# Altium PCB 十六路输出.PcbDoc (part 2 of 3)
Units mm, origin at the board's own origin, x right, y up, seen from the top; angles counter-clockwise.
Board outline 122.4 x 87.4 mm, 2 copper layers (Top Layer, Bottom Layer); 99 components, 112 nets, 383 pads, 41 vias.
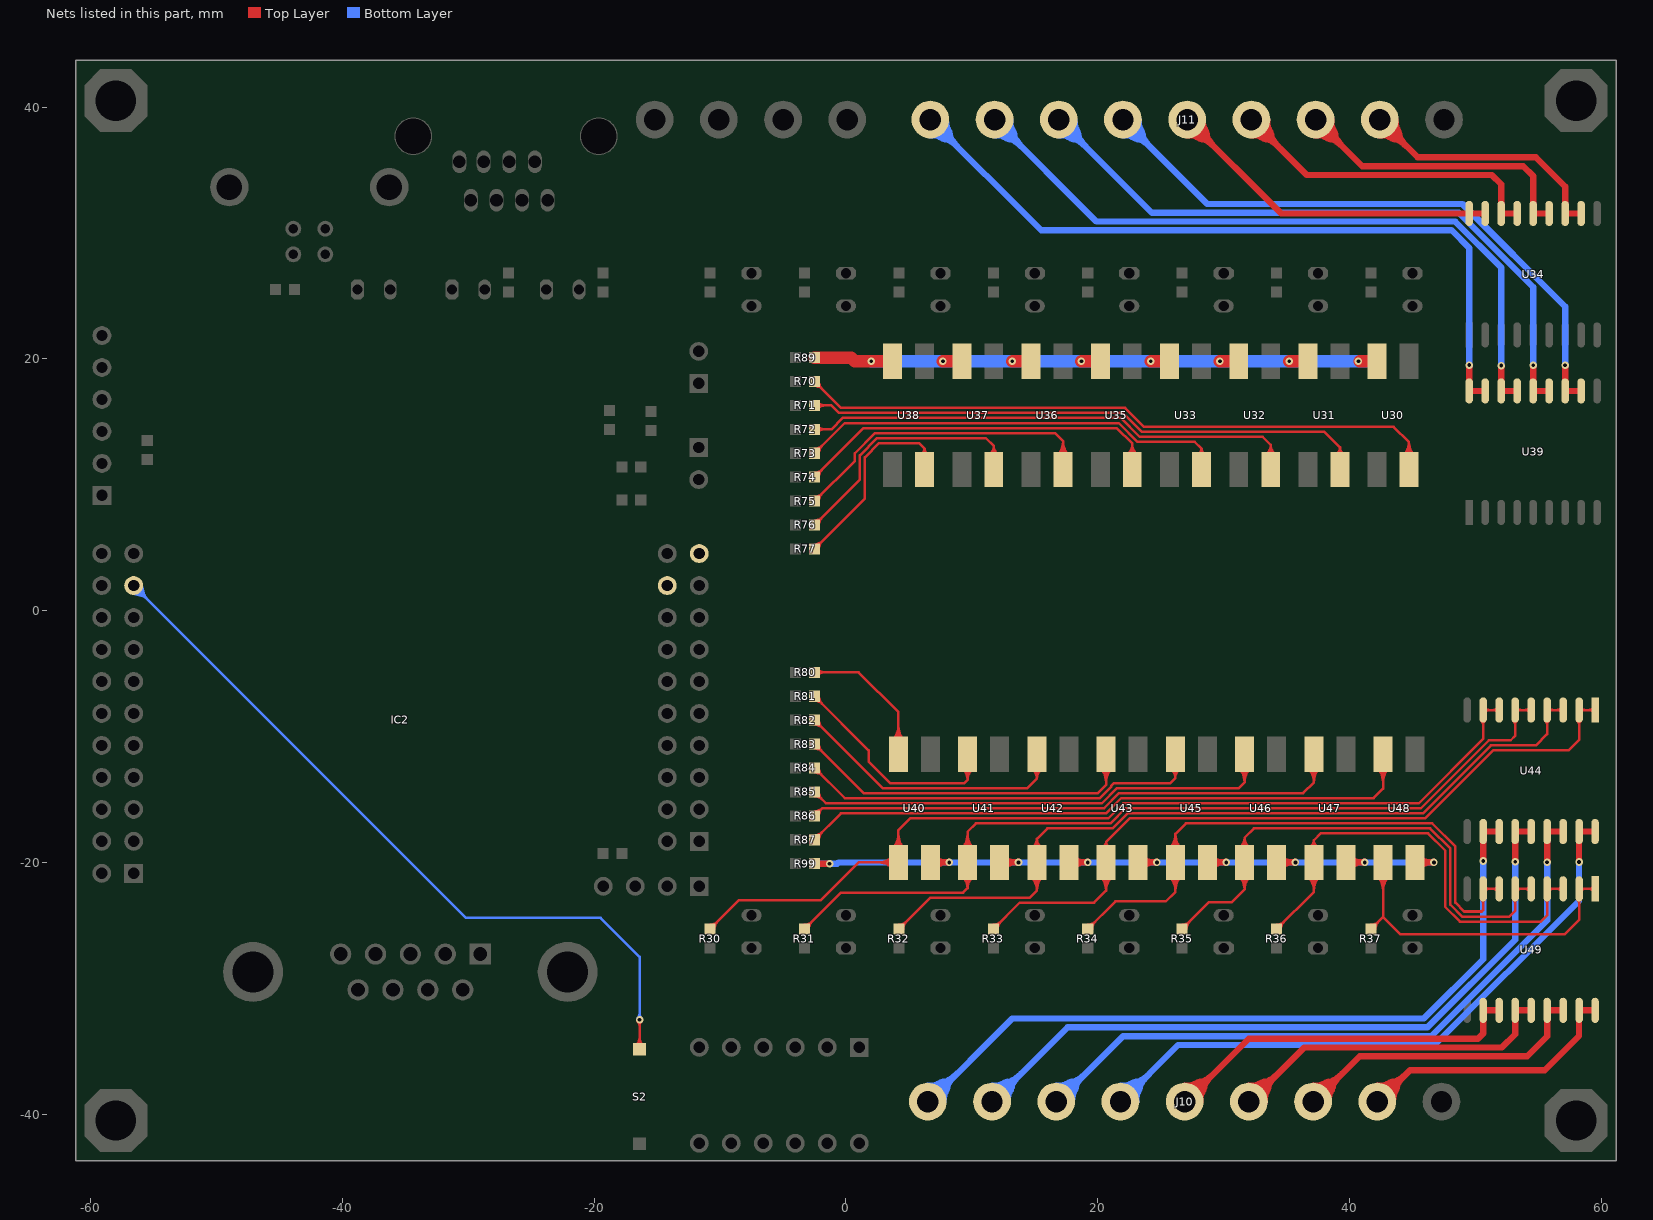
[diagram p2: the nets of this part, all layers, seen from the top]

## Via types
v1: diameter 0.6, hole 0.3, Top Layer to Bottom Layer, 41 vias

## Nets (pads, with @x,y where several pads share a name; then routed paths per layer and width w, separated by ;. In a path a pad name is that pad's centre, name@x,y a point inside that pad or via, vN(x,y) a via of type N, cw(c..) or ccw(c..) an arc to the next point about the centre after c; other vN are vias at no path point) (continued)
NetR30_1: R30.1 U40.3 U44.7 U44.8 | length 98
  Top Layer w0.2: R30.1@-10.9,-25.5 R30.1@-10.75,-25.35 ; R30.1@-10.859,-25.288 cw(c-10.324,-25.397) R30.1@-10.465,-24.87 ; R30.1@-10.8,-25.3 -8.5,-23 -2,-23 1,-20 U40.3@4.16,-20 4.16,-17.44 5.1,-16.5 20.828,-16.5 22.028,-15.3 45.5,-15.3 50.61,-10.19 U44.8@50.61,-7.9 U44.7@51.88,-7.9 ; R30.1@-10.788,-25.359 ccw(c-10.897,-24.824) R30.1@-10.37,-24.965 ; -10.22,-24.72 cw(c-10.8,-24.139) -10.8,-24.96 ccw(c-10.8,-24.139) -10.22,-24.72 ; -10.22,-24.72 ccw(c-9.639,-25.3) -10.46,-25.3 cw(c-9.639,-25.3) -10.22,-24.72 ; 2.591,-20 cw(c2.591,-21.569) 3.7,-20.46 ccw(c2.591,-21.569) 2.591,-20 ; 2.591,-20 ccw(c2.591,-18.431) 3.7,-19.54 cw(c2.591,-18.431) 2.591,-20 ; 3.074,-20 cw(c3.074,-21.086) 3.842,-20.318 ccw(c3.074,-21.086) 3.074,-20 ; 3.074,-20 ccw(c3.074,-18.914) 3.842,-19.682 cw(c3.074,-18.914) 3.074,-20 ; 4.16,-18.264 cw(c3.074,-18.264) 3.842,-19.032 ccw(c3.074,-18.264) 4.16,-18.264 ; 4.16,-18.264 ccw(c5.246,-18.264) 4.478,-19.032 cw(c5.246,-18.264) 4.16,-18.264 ; 4.16,-17.781 cw(c2.591,-17.781) 3.7,-18.89 ccw(c2.591,-17.781) 4.16,-17.781 ; 4.16,-17.781 ccw(c5.729,-17.781) 4.62,-18.89 cw(c5.729,-17.781) 4.16,-17.781 ; 50.61,-9.083 cw(c51.093,-9.083) 50.751,-8.741 ccw(c51.093,-9.083) 50.61,-9.083 ; 50.61,-9.083 ccw(c50.127,-9.083) 50.469,-8.741 cw(c50.127,-9.083) 50.61,-9.083 ; 51.093,-7.9 cw(c51.093,-7.417) 50.751,-7.759 ccw(c51.093,-7.417) 51.093,-7.9 ; 51.093,-7.9 ccw(c51.093,-8.383) 50.751,-8.041 cw(c51.093,-8.383) 51.093,-7.9 ; 51.397,-7.9 cw(c51.397,-8.383) 51.739,-8.041 ccw(c51.397,-8.383) 51.397,-7.9 ; 51.397,-7.9 ccw(c51.397,-7.417) 51.739,-7.759 cw(c51.397,-7.417) 51.397,-7.9
NetR31_1: R31.1 U41.3 U44.5 U44.6 | length 92.5
  Top Layer w0.2: R31.1@-3.4,-25.5 R31.1@-3.25,-25.35 ; R31.1@-3.359,-25.288 cw(c-2.824,-25.397) R31.1@-2.965,-24.87 ; R31.1@-3.3,-25.3 -0.4,-22.4 9.3,-22.4 9.66,-22.04 ; R31.1@-3.288,-25.359 ccw(c-3.397,-24.824) R31.1@-2.87,-24.965 ; U44.5@54.42,-7.9 U44.6@53.15,-7.9 53.15,-9.95 52.8,-10.3 51.066,-10.3 45.666,-15.7 22.194,-15.7 20.994,-16.9 10.325,-16.9 9.66,-17.565 U41.3@9.66,-20 9.66,-22.04 ; -2.72,-24.72 cw(c-3.3,-24.139) -3.3,-24.96 ccw(c-3.3,-24.139) -2.72,-24.72 ; -2.72,-24.72 ccw(c-2.139,-25.3) -2.96,-25.3 cw(c-2.139,-25.3) -2.72,-24.72 ; 9.66,-22.04 cw(c10.821,-22.04) 10.077,-21.149 ccw(c10.821,-22.04) 9.66,-22.04 ; 9.66,-22.04 ccw(c8.499,-22.04) 9.243,-21.149 cw(c8.499,-22.04) 9.66,-22.04 ; 9.66,-21.612 cw(c10.464,-21.612) 9.948,-20.995 ccw(c10.464,-21.612) 9.66,-21.612 ; 9.66,-21.612 ccw(c8.856,-21.612) 9.372,-20.995 cw(c8.856,-21.612) 9.66,-21.612 ; 9.66,-18.264 cw(c8.574,-18.264) 9.342,-19.032 ccw(c8.574,-18.264) 9.66,-18.264 ; 9.66,-18.264 ccw(c10.746,-18.264) 9.978,-19.032 cw(c10.746,-18.264) 9.66,-18.264 ; 9.66,-17.781 cw(c8.091,-17.781) 9.2,-18.89 ccw(c8.091,-17.781) 9.66,-17.781 ; 9.66,-17.781 ccw(c11.229,-17.781) 10.12,-18.89 cw(c11.229,-17.781) 9.66,-17.781 ; 53.15,-9.083 cw(c53.633,-9.083) 53.291,-8.741 ccw(c53.633,-9.083) 53.15,-9.083 ; 53.15,-9.083 ccw(c52.667,-9.083) 53.009,-8.741 cw(c52.667,-9.083) 53.15,-9.083 ; 53.633,-7.9 cw(c53.633,-7.417) 53.291,-7.759 ccw(c53.633,-7.417) 53.633,-7.9 ; 53.633,-7.9 ccw(c53.633,-8.383) 53.291,-8.041 cw(c53.633,-8.383) 53.633,-7.9 ; 53.937,-7.9 cw(c53.937,-8.383) 54.279,-8.041 ccw(c53.937,-8.383) 53.937,-7.9 ; 53.937,-7.9 ccw(c53.937,-7.417) 54.279,-7.759 cw(c53.937,-7.417) 53.937,-7.9
NetR32_1: R32.1 U42.3 U44.3 U44.4 | length 85.7
  Top Layer w0.2: R32.1@4.1,-25.5 R32.1@4.25,-25.35 ; R32.1@4.141,-25.288 cw(c4.676,-25.397) R32.1@4.535,-24.87 ; R32.1@4.2,-25.3 6.7,-22.8 14.6,-22.8 15.16,-22.24 U42.3@15.16,-20 15.16,-18.14 ; R32.1@4.212,-25.359 ccw(c4.103,-24.824) R32.1@4.63,-24.965 ; U44.3@56.96,-7.9 U44.4@55.69,-7.9 55.69,-9.81 54.8,-10.7 51.231,-10.7 45.831,-16.1 22.36,-16.1 21.16,-17.3 16,-17.3 15.16,-18.14 ; 4.78,-24.72 cw(c4.2,-24.139) 4.2,-24.96 ccw(c4.2,-24.139) 4.78,-24.72 ; 4.78,-24.72 ccw(c5.361,-25.3) 4.54,-25.3 cw(c5.361,-25.3) 4.78,-24.72 ; 15.16,-22.219 cw(c16.729,-22.219) 15.62,-21.11 ccw(c16.729,-22.219) 15.16,-22.219 ; 15.16,-22.219 ccw(c13.591,-22.219) 14.7,-21.11 cw(c13.591,-22.219) 15.16,-22.219 ; 15.16,-21.736 cw(c16.246,-21.736) 15.478,-20.968 ccw(c16.246,-21.736) 15.16,-21.736 ; 15.16,-21.736 ccw(c14.074,-21.736) 14.842,-20.968 cw(c14.074,-21.736) 15.16,-21.736 ; 15.16,-18.512 cw(c14.605,-18.512) 14.912,-18.975 ccw(c14.605,-18.512) 15.16,-18.512 ; 15.16,-18.512 ccw(c15.715,-18.512) 15.408,-18.975 cw(c15.715,-18.512) 15.16,-18.512 ; 15.16,-18.14 cw(c14.359,-18.14) 14.801,-18.808 ccw(c14.359,-18.14) 15.16,-18.14 ; 15.16,-18.14 ccw(c15.961,-18.14) 15.519,-18.808 cw(c15.961,-18.14) 15.16,-18.14 ; 55.69,-9.083 cw(c56.173,-9.083) 55.831,-8.741 ccw(c56.173,-9.083) 55.69,-9.083 ; 55.69,-9.083 ccw(c55.207,-9.083) 55.549,-8.741 cw(c55.207,-9.083) 55.69,-9.083 ; 56.173,-7.9 cw(c56.173,-7.417) 55.831,-7.759 ccw(c56.173,-7.417) 56.173,-7.9 ; 56.173,-7.9 ccw(c56.173,-8.383) 55.831,-8.041 cw(c56.173,-8.383) 56.173,-7.9 ; 56.477,-7.9 cw(c56.477,-8.383) 56.819,-8.041 ccw(c56.477,-8.383) 56.477,-7.9 ; 56.477,-7.9 ccw(c56.477,-7.417) 56.819,-7.759 cw(c56.477,-7.417) 56.477,-7.9
NetR33_1: R33.1 U43.3 U44.1 U44.2 | length 77.5
  Top Layer w0.2: R33.1@11.6,-25.5 R33.1@11.75,-25.35 ; R33.1@11.641,-25.288 cw(c12.176,-25.397) R33.1@12.035,-24.87 ; R33.1@11.7,-25.3 13.8,-23.2 19.7,-23.2 20.66,-22.24 U43.3@20.66,-20 20.66,-18.365 ; R33.1@11.712,-25.359 ccw(c11.603,-24.824) R33.1@12.13,-24.965 ; U44.1@59.5,-7.9 U44.2@58.23,-7.9 58.23,-10.27 57.4,-11.1 51.397,-11.1 45.997,-16.5 22.525,-16.5 20.66,-18.365 ; 12.28,-24.72 cw(c11.7,-24.139) 11.7,-24.96 ccw(c11.7,-24.139) 12.28,-24.72 ; 12.28,-24.72 ccw(c12.861,-25.3) 12.04,-25.3 cw(c12.861,-25.3) 12.28,-24.72 ; 20.66,-22.219 cw(c22.229,-22.219) 21.12,-21.11 ccw(c22.229,-22.219) 20.66,-22.219 ; 20.66,-22.219 ccw(c19.091,-22.219) 20.2,-21.11 cw(c19.091,-22.219) 20.66,-22.219 ; 20.66,-21.736 cw(c21.746,-21.736) 20.978,-20.968 ccw(c21.746,-21.736) 20.66,-21.736 ; 20.66,-21.736 ccw(c19.574,-21.736) 20.342,-20.968 cw(c19.574,-21.736) 20.66,-21.736 ; 20.66,-18.365 cw(c20.239,-18.365) 20.405,-18.752 ccw(c20.239,-18.365) 20.66,-18.365 ; 20.66,-18.365 ccw(c21.081,-18.365) 20.915,-18.752 cw(c21.081,-18.365) 20.66,-18.365 ; 58.23,-9.083 cw(c58.713,-9.083) 58.371,-8.741 ccw(c58.713,-9.083) 58.23,-9.083 ; 58.23,-9.083 ccw(c57.747,-9.083) 58.089,-8.741 cw(c57.747,-9.083) 58.23,-9.083 ; 58.713,-7.9 cw(c58.713,-7.417) 58.371,-7.759 ccw(c58.713,-7.417) 58.713,-7.9 ; 58.713,-7.9 ccw(c58.713,-8.383) 58.371,-8.041 cw(c58.713,-8.383) 58.713,-7.9 ; 59.017,-7.9 cw(c59.017,-8.383) 59.359,-8.041 ccw(c59.017,-8.383) 59.017,-7.9 ; 59.017,-7.9 ccw(c59.017,-7.417) 59.359,-7.759 cw(c59.017,-7.417) 59.017,-7.9
NetR34_1: R34.1 U45.3 U49.7 U49.8 | length 71.3
  Top Layer w0.2: R34.1@19.1,-25.5 R34.1@19.25,-25.35 ; R34.1@19.141,-25.288 cw(c19.676,-25.397) R34.1@19.535,-24.87 ; R34.1@19.2,-25.3 21.4,-23.1 25.4,-23.1 26.16,-22.34 U45.3@26.16,-20 26.16,-17.74 27,-16.9 46.566,-16.9 48.4,-18.734 48.4,-23.2 49.1,-23.9 50.5,-23.9 50.61,-23.79 U49.8@50.61,-22.1 U49.7@51.88,-22.1 ; R34.1@19.212,-25.359 ccw(c19.103,-24.824) R34.1@19.63,-24.965 ; 19.78,-24.72 cw(c19.2,-24.139) 19.2,-24.96 ccw(c19.2,-24.139) 19.78,-24.72 ; 19.78,-24.72 ccw(c20.361,-25.3) 19.54,-25.3 cw(c20.361,-25.3) 19.78,-24.72 ; 26.16,-22.219 cw(c27.729,-22.219) 26.62,-21.11 ccw(c27.729,-22.219) 26.16,-22.219 ; 26.16,-22.219 ccw(c24.591,-22.219) 25.7,-21.11 cw(c24.591,-22.219) 26.16,-22.219 ; 26.16,-21.736 cw(c27.246,-21.736) 26.478,-20.968 ccw(c27.246,-21.736) 26.16,-21.736 ; 26.16,-21.736 ccw(c25.074,-21.736) 25.842,-20.968 cw(c25.074,-21.736) 26.16,-21.736 ; 26.16,-18.264 cw(c25.074,-18.264) 25.842,-19.032 ccw(c25.074,-18.264) 26.16,-18.264 ; 26.16,-18.264 ccw(c27.246,-18.264) 26.478,-19.032 cw(c27.246,-18.264) 26.16,-18.264 ; 26.16,-17.781 cw(c24.591,-17.781) 25.7,-18.89 ccw(c24.591,-17.781) 26.16,-17.781 ; 26.16,-17.781 ccw(c27.729,-17.781) 26.62,-18.89 cw(c27.729,-17.781) 26.16,-17.781 ; 50.61,-23.283 cw(c51.093,-23.283) 50.751,-22.941 ccw(c51.093,-23.283) 50.61,-23.283 ; 50.61,-23.283 ccw(c50.127,-23.283) 50.469,-22.941 cw(c50.127,-23.283) 50.61,-23.283 ; 51.093,-22.1 cw(c51.093,-21.617) 50.751,-21.959 ccw(c51.093,-21.617) 51.093,-22.1 ; 51.093,-22.1 ccw(c51.093,-22.583) 50.751,-22.241 cw(c51.093,-22.583) 51.093,-22.1 ; 51.397,-22.1 cw(c51.397,-22.583) 51.739,-22.241 ccw(c51.397,-22.583) 51.397,-22.1 ; 51.397,-22.1 ccw(c51.397,-21.617) 51.739,-21.959 cw(c51.397,-21.617) 51.397,-22.1
NetR35_1: R35.1 U46.3 U49.5 U49.6 | length 63.3
  Top Layer w0.2: R35.1@26.6,-25.5 R35.1@26.75,-25.35 ; R35.1@26.641,-25.288 cw(c27.176,-25.397) R35.1@27.035,-24.87 ; R35.1@26.7,-25.3 28.85,-23.15 30.65,-23.15 31.66,-22.14 ; R35.1@26.712,-25.359 ccw(c26.603,-24.824) R35.1@27.13,-24.965 ; U49.5@54.42,-22.1 U49.6@53.15,-22.1 53.15,-23.85 52.7,-24.3 48.934,-24.3 48,-23.366 48,-18.9 46.4,-17.3 32.4,-17.3 31.66,-18.04 ; 27.28,-24.72 cw(c26.7,-24.139) 26.7,-24.96 ccw(c26.7,-24.139) 27.28,-24.72 ; 27.28,-24.72 ccw(c27.861,-25.3) 27.04,-25.3 cw(c27.861,-25.3) 27.28,-24.72 ; 31.66,-22.14 cw(c33.043,-22.14) 32.102,-21.126 ccw(c33.043,-22.14) 31.66,-22.14 ; 31.66,-22.14 ccw(c30.277,-22.14) 31.218,-21.126 cw(c30.277,-22.14) 31.66,-22.14 ; 31.66,-22.14 U46.3@31.66,-20 31.66,-18.04 ; 31.66,-21.681 cw(c32.617,-21.681) 31.966,-20.98 ccw(c32.617,-21.681) 31.66,-21.681 ; 31.66,-21.681 ccw(c30.703,-21.681) 31.354,-20.98 cw(c30.703,-21.681) 31.66,-21.681 ; 31.66,-18.443 cw(c30.971,-18.443) 31.388,-18.992 ccw(c30.971,-18.443) 31.66,-18.443 ; 31.66,-18.443 ccw(c32.349,-18.443) 31.932,-18.992 cw(c32.349,-18.443) 31.66,-18.443 ; 31.66,-18.04 cw(c30.665,-18.04) 31.267,-18.832 ccw(c30.665,-18.04) 31.66,-18.04 ; 31.66,-18.04 ccw(c32.655,-18.04) 32.053,-18.832 cw(c32.655,-18.04) 31.66,-18.04 ; 53.15,-23.283 cw(c53.633,-23.283) 53.291,-22.941 ccw(c53.633,-23.283) 53.15,-23.283 ; 53.15,-23.283 ccw(c52.667,-23.283) 53.009,-22.941 cw(c52.667,-23.283) 53.15,-23.283 ; 53.633,-22.1 cw(c53.633,-21.617) 53.291,-21.959 ccw(c53.633,-21.617) 53.633,-22.1 ; 53.633,-22.1 ccw(c53.633,-22.583) 53.291,-22.241 cw(c53.633,-22.583) 53.633,-22.1 ; 53.937,-22.1 cw(c53.937,-22.583) 54.279,-22.241 ccw(c53.937,-22.583) 53.937,-22.1 ; 53.937,-22.1 ccw(c53.937,-21.617) 54.279,-21.959 cw(c53.937,-21.617) 53.937,-22.1
NetR36_1: R36.1 U47.3 U49.3 U49.4 | length 57.5
  Top Layer w0.2: R36.1@34.1,-25.5 R36.1@34.25,-25.35 ; R36.1@34.141,-25.288 cw(c34.676,-25.397) R36.1@34.535,-24.87 ; R36.1@34.2,-25.3 37.16,-22.34 U47.3@37.16,-20 37.16,-18.24 ; R36.1@34.212,-25.359 ccw(c34.103,-24.824) R36.1@34.63,-24.965 ; U49.3@56.96,-22.1 U49.4@55.69,-22.1 55.69,-24.21 55.2,-24.7 48.769,-24.7 47.6,-23.531 47.6,-19.066 46.234,-17.7 37.7,-17.7 37.16,-18.24 ; 34.78,-24.72 cw(c34.2,-24.139) 34.2,-24.96 ccw(c34.2,-24.139) 34.78,-24.72 ; 34.78,-24.72 ccw(c35.361,-25.3) 34.54,-25.3 cw(c35.361,-25.3) 34.78,-24.72 ; 37.16,-22.219 cw(c38.729,-22.219) 37.62,-21.11 ccw(c38.729,-22.219) 37.16,-22.219 ; 37.16,-22.219 ccw(c35.591,-22.219) 36.7,-21.11 cw(c35.591,-22.219) 37.16,-22.219 ; 37.16,-21.736 cw(c38.246,-21.736) 37.478,-20.968 ccw(c38.246,-21.736) 37.16,-21.736 ; 37.16,-21.736 ccw(c36.074,-21.736) 36.842,-20.968 cw(c36.074,-21.736) 37.16,-21.736 ; 37.16,-18.582 cw(c36.729,-18.582) 36.94,-18.958 ccw(c36.729,-18.582) 37.16,-18.582 ; 37.16,-18.582 ccw(c37.591,-18.582) 37.38,-18.958 cw(c37.591,-18.582) 37.16,-18.582 ; 37.16,-18.24 cw(c36.537,-18.24) 36.842,-18.783 ccw(c36.537,-18.24) 37.16,-18.24 ; 37.16,-18.24 ccw(c37.783,-18.24) 37.478,-18.783 cw(c37.783,-18.24) 37.16,-18.24 ; 55.69,-23.283 cw(c56.173,-23.283) 55.831,-22.941 ccw(c56.173,-23.283) 55.69,-23.283 ; 55.69,-23.283 ccw(c55.207,-23.283) 55.549,-22.941 cw(c55.207,-23.283) 55.69,-23.283 ; 56.173,-22.1 cw(c56.173,-21.617) 55.831,-21.959 ccw(c56.173,-21.617) 56.173,-22.1 ; 56.173,-22.1 ccw(c56.173,-22.583) 55.831,-22.241 cw(c56.173,-22.583) 56.173,-22.1 ; 56.477,-22.1 cw(c56.477,-22.583) 56.819,-22.241 ccw(c56.477,-22.583) 56.477,-22.1 ; 56.477,-22.1 ccw(c56.477,-21.617) 56.819,-21.959 cw(c56.477,-21.617) 56.477,-22.1
NetR37_1: R37.1 U48.3 U49.1 U49.2 | length 42.7
  Top Layer w0.2: R37.1@41.641,-25.288 cw(c42.176,-25.397) R37.1@42.035,-24.87 ; R37.1@41.7,-25.3 42.66,-24.34 ; R37.1@41.712,-25.359 ccw(c41.603,-24.824) R37.1@42.13,-24.965 ; U48.3@42.66,-20 42.66,-24.34 ; U49.1@59.5,-22.1 U49.2@58.23,-22.1 58.23,-24.57 57.1,-25.7 44.02,-25.7 42.66,-24.34 ; 42.28,-24.72 cw(c41.7,-24.139) 41.7,-24.96 ccw(c41.7,-24.139) 42.28,-24.72 ; 42.28,-24.72 ccw(c42.861,-25.3) 42.04,-25.3 cw(c42.861,-25.3) 42.28,-24.72 ; 42.66,-22.219 cw(c44.229,-22.219) 43.12,-21.11 ccw(c44.229,-22.219) 42.66,-22.219 ; 42.66,-22.219 ccw(c41.091,-22.219) 42.2,-21.11 cw(c41.091,-22.219) 42.66,-22.219 ; 42.66,-21.736 cw(c43.746,-21.736) 42.978,-20.968 ccw(c43.746,-21.736) 42.66,-21.736 ; 42.66,-21.736 ccw(c41.574,-21.736) 42.342,-20.968 cw(c41.574,-21.736) 42.66,-21.736 ; 58.23,-23.283 cw(c58.713,-23.283) 58.371,-22.941 ccw(c58.713,-23.283) 58.23,-23.283 ; 58.23,-23.283 ccw(c57.747,-23.283) 58.089,-22.941 cw(c57.747,-23.283) 58.23,-23.283 ; 58.713,-22.1 cw(c58.713,-21.617) 58.371,-21.959 ccw(c58.713,-21.617) 58.713,-22.1 ; 58.713,-22.1 ccw(c58.713,-22.583) 58.371,-22.241 cw(c58.713,-22.583) 58.713,-22.1 ; 59.017,-22.1 cw(c59.017,-22.583) 59.359,-22.241 ccw(c59.017,-22.583) 59.017,-22.1 ; 59.017,-22.1 ccw(c59.017,-21.617) 59.359,-21.959 cw(c59.017,-21.617) 59.017,-22.1
NetR70_2: R70.2 U30.2 | length 63.2
  Top Layer w0.2: R70.2@-2.559,18.188 ccw(c-2.024,18.297) R70.2@-2.165,17.77 ; R70.2@-2.5,18.2 -0.4,16.1 22.163,16.1 23.663,14.6 43.5,14.6 44.715,13.385 ; R70.2@-2.488,18.259 cw(c-2.597,17.724) R70.2@-2.07,17.865 ; U30.2@44.715,11.2 44.715,13.385 ; -1.92,17.62 cw(c-1.339,18.2) -2.16,18.2 ccw(c-1.339,18.2) -1.92,17.62 ; -1.92,17.62 ccw(c-2.5,17.039) -2.5,17.86 cw(c-2.5,17.039) -1.92,17.62 ; 44.715,12.913 cw(c43.685,12.913) 44.402,12.173 ccw(c43.685,12.913) 44.715,12.913 ; 44.715,12.913 ccw(c45.745,12.913) 45.028,12.173 cw(c45.745,12.913) 44.715,12.913 ; 44.715,13.385 cw(c43.228,13.385) 44.263,12.317 ccw(c43.228,13.385) 44.715,13.385 ; 44.715,13.385 ccw(c46.202,13.385) 45.167,12.317 cw(c46.202,13.385) 44.715,13.385
NetR71_2: R71.2 U31.2 | length 51.9
  Top Layer w0.2: R71.2@-2.5,16.3 -1.166,16.3 -0.566,15.7 21.997,15.7 23.497,14.2 38,14.2 39.24,12.96 ; U31.2@39.24,11.2 39.24,12.96 ; -1.679,16.3 cw(c-1.679,17.121) -2.26,16.54 ccw(c-1.679,17.121) -1.679,16.3 ; -1.679,16.3 ccw(c-1.679,15.479) -2.26,16.06 cw(c-1.679,15.479) -1.679,16.3 ; 39.24,12.618 cw(c38.809,12.618) 39.02,12.242 ccw(c38.809,12.618) 39.24,12.618 ; 39.24,12.618 ccw(c39.671,12.618) 39.46,12.242 cw(c39.671,12.618) 39.24,12.618 ; 39.24,12.96 cw(c38.617,12.96) 38.922,12.417 ccw(c38.617,12.96) 39.24,12.96 ; 39.24,12.96 ccw(c39.863,12.96) 39.558,12.417 cw(c39.863,12.96) 39.24,12.96
NetR72_2: R72.2 U32.2 | length 48.2
  Top Layer w0.2: R72.2@-2.5,14.4 -1.166,14.4 -0.266,15.3 21.831,15.3 23.331,13.8 33.1,13.8 33.74,13.16 ; U32.2@33.74,11.2 33.74,13.16 ; -1.679,14.4 cw(c-1.679,15.221) -2.26,14.64 ccw(c-1.679,15.221) -1.679,14.4 ; -1.679,14.4 ccw(c-1.679,13.579) -2.26,14.16 cw(c-1.679,13.579) -1.679,14.4 ; 33.74,12.757 cw(c33.051,12.757) 33.468,12.208 ccw(c33.051,12.757) 33.74,12.757 ; 33.74,12.757 ccw(c34.429,12.757) 34.012,12.208 cw(c34.429,12.757) 33.74,12.757 ; 33.74,13.16 cw(c32.745,13.16) 33.347,12.368 ccw(c32.745,13.16) 33.74,13.16 ; 33.74,13.16 ccw(c34.735,13.16) 34.133,12.368 cw(c34.735,13.16) 33.74,13.16
NetR73_2: R73.2 U33.2 | length 40.1
  Top Layer w0.2: R73.2@-2.559,12.512 cw(c-2.024,12.403) R73.2@-2.165,12.93 ; R73.2@-2.5,12.5 -0.1,14.9 21.666,14.9 23.166,13.4 27.7,13.4 28.24,12.86 ; R73.2@-2.488,12.441 ccw(c-2.597,12.976) R73.2@-2.07,12.835 ; U33.2@28.24,11.2 28.24,12.86 ; -1.92,13.08 cw(c-2.5,13.661) -2.5,12.84 ccw(c-2.5,13.661) -1.92,13.08 ; -1.92,13.08 ccw(c-1.339,12.5) -2.16,12.5 cw(c-1.339,12.5) -1.92,13.08 ; 28.24,12.86 cw(c27.78,12.86) 27.971,12.442 ccw(c27.78,12.86) 28.24,12.86 ; 28.24,12.86 ccw(c28.7,12.86) 28.509,12.442 cw(c28.7,12.86) 28.24,12.86
NetR74_2: R74.2 U35.2 | length 40.3
  Top Layer w0.2: R74.2@-2.559,10.612 cw(c-2.024,10.503) R74.2@-2.165,11.03 ; R74.2@-2.5,10.6 1.4,14.5 21.5,14.5 22.74,13.26 ; R74.2@-2.488,10.541 ccw(c-2.597,11.076) R74.2@-2.07,10.935 ; U35.2@22.74,11.2 22.74,13.26 ; -1.92,11.18 cw(c-2.5,11.761) -2.5,10.94 ccw(c-2.5,11.761) -1.92,11.18 ; -1.92,11.18 ccw(c-1.339,10.6) -2.16,10.6 cw(c-1.339,10.6) -1.92,11.18 ; 22.74,12.826 cw(c21.906,12.826) 22.448,12.192 ccw(c21.906,12.826) 22.74,12.826 ; 22.74,12.826 ccw(c23.574,12.826) 23.032,12.192 cw(c23.574,12.826) 22.74,12.826 ; 22.74,13.26 cw(c21.536,13.26) 22.318,12.344 ccw(c21.536,13.26) 22.74,13.26 ; 22.74,13.26 ccw(c23.944,13.26) 23.162,12.344 cw(c23.944,13.26) 22.74,13.26
NetR75_2: R75.2 U36.2 | length 37
  Top Layer w0.2: R75.2@-2.559,8.712 cw(c-2.024,8.603) R75.2@-2.165,9.13 ; R75.2@-2.5,8.7 0.7,11.9 0.7,12.5 2.3,14.1 3.4,14.1 16.6,14.1 17.24,13.46 U36.2@17.24,11.2 ; R75.2@-2.488,8.641 ccw(c-2.597,9.176) R75.2@-2.07,9.035 ; -1.92,9.28 cw(c-2.5,9.861) -2.5,9.04 ccw(c-2.5,9.861) -1.92,9.28 ; -1.92,9.28 ccw(c-1.339,8.7) -2.16,8.7 cw(c-1.339,8.7) -1.92,9.28 ; 17.24,12.936 cw(c16.154,12.936) 16.922,12.168 ccw(c16.154,12.936) 17.24,12.936 ; 17.24,12.936 ccw(c18.326,12.936) 17.558,12.168 cw(c18.326,12.936) 17.24,12.936 ; 17.24,13.419 cw(c15.671,13.419) 16.78,12.31 ccw(c15.671,13.419) 17.24,13.419 ; 17.24,13.419 ccw(c18.809,13.419) 17.7,12.31 cw(c18.809,13.419) 17.24,13.419
NetR76_2: R76.2 U37.2 | length 29.5
  Top Layer w0.2: R76.2@-2.559,6.812 cw(c-2.024,6.703) R76.2@-2.165,7.23 ; R76.2@-2.5,6.8 1.1,10.4 1.1,12.334 2.466,13.7 11.1,13.7 11.74,13.06 ; R76.2@-2.488,6.741 ccw(c-2.597,7.276) R76.2@-2.07,7.135 ; U37.2@11.74,11.2 11.74,13.06 ; -1.92,7.38 cw(c-2.5,7.961) -2.5,7.14 ccw(c-2.5,7.961) -1.92,7.38 ; -1.92,7.38 ccw(c-1.339,6.8) -2.16,6.8 cw(c-1.339,6.8) -1.92,7.38 ; 11.74,12.688 cw(c11.185,12.688) 11.492,12.225 ccw(c11.185,12.688) 11.74,12.688 ; 11.74,12.688 ccw(c12.295,12.688) 11.988,12.225 cw(c12.295,12.688) 11.74,12.688 ; 11.74,13.06 cw(c10.939,13.06) 11.381,12.392 ccw(c10.939,13.06) 11.74,13.06 ; 11.74,13.06 ccw(c12.541,13.06) 12.099,12.392 cw(c12.541,13.06) 11.74,13.06
NetR77_2: R77.2 U38.2 | length 21.9
  Top Layer w0.2: R77.2@-2.559,4.912 cw(c-2.024,4.803) R77.2@-2.165,5.33 ; R77.2@-2.5,4.9 1.5,8.9 1.5,12.169 2.631,13.3 5.8,13.3 6.24,12.86 ; R77.2@-2.488,4.841 ccw(c-2.597,5.376) R77.2@-2.07,5.235 ; U38.2@6.24,11.2 6.24,12.86 ; -1.92,5.48 cw(c-2.5,6.061) -2.5,5.24 ccw(c-2.5,6.061) -1.92,5.48 ; -1.92,5.48 ccw(c-1.339,4.9) -2.16,4.9 cw(c-1.339,4.9) -1.92,5.48 ; 6.24,12.86 cw(c5.78,12.86) 5.971,12.442 ccw(c5.78,12.86) 6.24,12.86 ; 6.24,12.86 ccw(c6.7,12.86) 6.509,12.442 cw(c6.7,12.86) 6.24,12.86
NetR80_2: R80.2 U40.2 | length 22.2
  Top Layer w0.2: R80.2@-2.5,-4.9 1,-4.9 4.16,-8.06 U40.2@4.16,-11.4 ; -1.679,-4.9 cw(c-1.679,-4.079) -2.26,-4.66 ccw(c-1.679,-4.079) -1.679,-4.9 ; -1.679,-4.9 ccw(c-1.679,-5.721) -2.26,-5.14 cw(c-1.679,-5.721) -1.679,-4.9 ; 4.16,-9.664 cw(c3.074,-9.664) 3.842,-10.432 ccw(c3.074,-9.664) 4.16,-9.664 ; 4.16,-9.664 ccw(c5.246,-9.664) 4.478,-10.432 cw(c5.246,-9.664) 4.16,-9.664 ; 4.16,-9.181 cw(c2.591,-9.181) 3.7,-10.29 ccw(c2.591,-9.181) 4.16,-9.181 ; 4.16,-9.181 ccw(c5.729,-9.181) 4.62,-10.29 cw(c5.729,-9.181) 4.16,-9.181
NetR81_2: R81.2 U41.2 | length 28.4
  Top Layer w0.2: R81.2@-2.559,-6.812 ccw(c-2.024,-6.703) R81.2@-2.165,-7.23 ; R81.2@-2.5,-6.8 1.8,-11.1 1.8,-12 3.5,-13.7 9.4,-13.7 9.66,-13.44 ; R81.2@-2.488,-6.741 cw(c-2.597,-7.276) R81.2@-2.07,-7.135 ; U41.2@9.66,-11.4 9.66,-13.44 ; -1.92,-7.38 cw(c-1.339,-6.8) -2.16,-6.8 ccw(c-1.339,-6.8) -1.92,-7.38 ; -1.92,-7.38 ccw(c-2.5,-7.961) -2.5,-7.14 cw(c-2.5,-7.961) -1.92,-7.38 ; 9.66,-13.44 cw(c10.821,-13.44) 10.077,-12.549 ccw(c10.821,-13.44) 9.66,-13.44 ; 9.66,-13.44 ccw(c8.499,-13.44) 9.243,-12.549 cw(c8.499,-13.44) 9.66,-13.44 ; 9.66,-13.012 cw(c10.464,-13.012) 9.948,-12.395 ccw(c10.464,-13.012) 9.66,-13.012 ; 9.66,-13.012 ccw(c8.856,-13.012) 9.372,-12.395 cw(c8.856,-13.012) 9.66,-13.012
NetR82_2: R82.2 U42.2 | length 32
  Top Layer w0.2: R82.2@-2.559,-8.712 ccw(c-2.024,-8.603) R82.2@-2.165,-9.13 ; R82.2@-2.5,-8.7 2.9,-14.1 14.4,-14.1 15.16,-13.34 ; R82.2@-2.488,-8.641 cw(c-2.597,-9.176) R82.2@-2.07,-9.035 ; U42.2@15.16,-11.4 15.16,-13.34 ; -1.92,-9.28 cw(c-1.339,-8.7) -2.16,-8.7 ccw(c-1.339,-8.7) -1.92,-9.28 ; -1.92,-9.28 ccw(c-2.5,-9.861) -2.5,-9.04 cw(c-2.5,-9.861) -1.92,-9.28 ; 15.16,-13.34 cw(c16.115,-13.34) 15.547,-12.572 ccw(c16.115,-13.34) 15.16,-13.34 ; 15.16,-13.34 ccw(c14.205,-13.34) 14.773,-12.572 cw(c14.205,-13.34) 15.16,-13.34 ; 15.16,-12.943 cw(c15.821,-12.943) 15.428,-12.412 ccw(c15.821,-12.943) 15.16,-12.943 ; 15.16,-12.943 ccw(c14.499,-12.943) 14.892,-12.412 cw(c14.499,-12.943) 15.16,-12.943
NetR83_2: R83.2 U43.2 | length 39.6
  Top Layer w0.2: R83.2@-2.559,-10.612 ccw(c-2.024,-10.503) R83.2@-2.165,-11.03 ; R83.2@-2.5,-10.6 1.4,-14.5 20,-14.5 20.66,-13.84 U43.2@20.66,-11.4 ; R83.2@-2.488,-10.541 cw(c-2.597,-11.076) R83.2@-2.07,-10.935 ; -1.92,-11.18 cw(c-1.339,-10.6) -2.16,-10.6 ccw(c-1.339,-10.6) -1.92,-11.18 ; -1.92,-11.18 ccw(c-2.5,-11.761) -2.5,-10.94 cw(c-2.5,-11.761) -1.92,-11.18 ; 20.66,-13.619 cw(c22.229,-13.619) 21.12,-12.51 ccw(c22.229,-13.619) 20.66,-13.619 ; 20.66,-13.619 ccw(c19.091,-13.619) 20.2,-12.51 cw(c19.091,-13.619) 20.66,-13.619 ; 20.66,-13.136 cw(c21.746,-13.136) 20.978,-12.368 ccw(c21.746,-13.136) 20.66,-13.136 ; 20.66,-13.136 ccw(c19.574,-13.136) 20.342,-12.368 cw(c19.574,-13.136) 20.66,-13.136
NetR84_2: R84.2 U45.2 | length 41.7
  Top Layer w0.2: R84.2@-2.559,-12.512 ccw(c-2.024,-12.403) R84.2@-2.165,-12.93 ; R84.2@-2.5,-12.5 -0.1,-14.9 20.166,-14.9 21.06,-14.006 21.06,-13.94 21.3,-13.7 25.76,-13.7 26.16,-13.3 ; R84.2@-2.488,-12.441 cw(c-2.597,-12.976) R84.2@-2.07,-12.835 ; U45.2@26.16,-11.4 26.16,-13.3 ; -1.92,-13.08 cw(c-1.339,-12.5) -2.16,-12.5 ccw(c-1.339,-12.5) -1.92,-13.08 ; -1.92,-13.08 ccw(c-2.5,-13.661) -2.5,-12.84 cw(c-2.5,-13.661) -1.92,-13.08 ; 26.16,-13.3 cw(c27.037,-13.3) 26.533,-12.582 ccw(c27.037,-13.3) 26.16,-13.3 ; 26.16,-13.3 ccw(c25.283,-13.3) 25.787,-12.582 cw(c25.283,-13.3) 26.16,-13.3 ; 26.16,-12.915 cw(c26.767,-12.915) 26.418,-12.418 ccw(c26.767,-12.915) 26.16,-12.915 ; 26.16,-12.915 ccw(c25.553,-12.915) 25.902,-12.418 cw(c25.553,-12.915) 26.16,-12.915
NetR85_2: R85.2 U46.2 | length 49.6
  Top Layer w0.2: R85.2@-2.559,-14.412 ccw(c-2.024,-14.303) R85.2@-2.165,-14.83 ; R85.2@-2.5,-14.4 -1.6,-15.3 20.331,-15.3 21.531,-14.1 31.2,-14.1 31.66,-13.64 U46.2@31.66,-11.4 ; R85.2@-2.488,-14.341 cw(c-2.597,-14.876) R85.2@-2.07,-14.735 ; -1.92,-14.98 cw(c-1.339,-14.4) -2.16,-14.4 ccw(c-1.339,-14.4) -1.92,-14.98 ; -1.92,-14.98 ccw(c-2.5,-15.561) -2.5,-14.74 cw(c-2.5,-15.561) -1.92,-14.98 ; 31.66,-13.619 cw(c33.229,-13.619) 32.12,-12.51 ccw(c33.229,-13.619) 31.66,-13.619 ; 31.66,-13.619 ccw(c30.091,-13.619) 31.2,-12.51 cw(c30.091,-13.619) 31.66,-13.619 ; 31.66,-13.136 cw(c32.746,-13.136) 31.978,-12.368 ccw(c32.746,-13.136) 31.66,-13.136 ; 31.66,-13.136 ccw(c30.574,-13.136) 31.342,-12.368 cw(c30.574,-13.136) 31.66,-13.136
NetR86_2: R86.2 U47.2 | length 55.1
  Top Layer w0.2: R86.2@-2.559,-16.288 cw(c-2.024,-16.397) R86.2@-2.165,-15.87 ; R86.2@-2.5,-16.3 -1.9,-15.7 20.497,-15.7 21.697,-14.5 36.3,-14.5 37.16,-13.64 U47.2@37.16,-11.4 ; R86.2@-2.488,-16.359 ccw(c-2.597,-15.824) R86.2@-2.07,-15.965 ; -1.92,-15.72 cw(c-2.5,-15.139) -2.5,-15.96 ccw(c-2.5,-15.139) -1.92,-15.72 ; -1.92,-15.72 ccw(c-1.339,-16.3) -2.16,-16.3 cw(c-1.339,-16.3) -1.92,-15.72 ; 37.16,-13.619 cw(c38.729,-13.619) 37.62,-12.51 ccw(c38.729,-13.619) 37.16,-13.619 ; 37.16,-13.619 ccw(c35.591,-13.619) 36.7,-12.51 cw(c35.591,-13.619) 37.16,-13.619 ; 37.16,-13.136 cw(c38.246,-13.136) 37.478,-12.368 ccw(c38.246,-13.136) 37.16,-13.136 ; 37.16,-13.136 ccw(c36.074,-13.136) 36.842,-12.368 cw(c36.074,-13.136) 37.16,-13.136
NetR87_2: R87.2 U48.2 | length 61.7
  Top Layer w0.2: R87.2@-2.559,-18.188 cw(c-2.024,-18.297) R87.2@-2.165,-17.77 ; R87.2@-2.5,-18.2 -0.4,-16.1 20.663,-16.1 21.863,-14.9 41.9,-14.9 42.66,-14.14 U48.2@42.66,-11.4 ; R87.2@-2.488,-18.259 ccw(c-2.597,-17.724) R87.2@-2.07,-17.865 ; -1.92,-17.62 cw(c-2.5,-17.039) -2.5,-17.86 ccw(c-2.5,-17.039) -1.92,-17.62 ; -1.92,-17.62 ccw(c-1.339,-18.2) -2.16,-18.2 cw(c-1.339,-18.2) -1.92,-17.62 ; 42.66,-13.619 cw(c44.229,-13.619) 43.12,-12.51 ccw(c44.229,-13.619) 42.66,-13.619 ; 42.66,-13.619 ccw(c41.091,-13.619) 42.2,-12.51 cw(c41.091,-13.619) 42.66,-13.619 ; 42.66,-13.136 cw(c43.746,-13.136) 42.978,-12.368 ccw(c43.746,-13.136) 42.66,-13.136 ; 42.66,-13.136 ccw(c41.574,-13.136) 42.342,-12.368 cw(c41.574,-13.136) 42.66,-13.136
NetR89_1: R89.1 U30.4 U31.4 U32.4 U33.4 U35.4 U36.4 U37.4 U38.4 | length 56.9
  Top Layer w1: R89.1@-2.5,20.1 0.4,20.1 0.7,19.8 U38.4@3.7,19.8 ; v1(7.7,19.8) U37.4@9.2,19.8 ; v1(13.2,19.8) U36.4@14.7,19.8 ; v1(18.7,19.8) U35.4@20.2,19.8 ; v1(24.2,19.8) U33.4@25.7,19.8 ; v1(29.7,19.8) U32.4@31.2,19.8 ; v1(35.2,19.8) U31.4@36.7,19.8 ; v1@40.8,19.8 U30.4@42.175,19.8
  Bottom Layer w1: v1(2,19.8) 42.175,19.8
  other v1: 40.7,19.8
NetR99_1: R99.1 U40.4 U41.4 U42.4 U43.4 U45.4 U46.4 U47.4 U48.4 | length 83.1
  Top Layer w0.5: R99.1@-2.5,-20.1 v1(-1.3,-20.1) ; R99.1@-2.366,-20.234 cw(c-2.041,-20.559) -2.041,-20.1 cw(c-2.041,-19.641) R99.1@-2.366,-19.966 ; U40.4@6.7,-20 v1(8.2,-20) ; U40.4@7.054,-20.354 cw(c7.907,-21.207) 7.907,-20 cw(c7.907,-18.793) U40.4@7.054,-19.646 ; 7.887,-20.005 cw(c7.985,-20.372) v1@8.175,-20.043 ; 7.887,-19.995 ccw(c7.985,-19.628) v1@8.175,-19.957 ; U41.4@12.2,-20 v1(13.7,-20) ; U41.4@12.554,-20.354 cw(c13.407,-21.207) 13.407,-20 cw(c13.407,-18.793) U41.4@12.554,-19.646 ; 13.387,-20.005 cw(c13.485,-20.372) v1@13.675,-20.043 ; 13.387,-19.995 ccw(c13.485,-19.628) v1@13.675,-19.957 ; U42.4@17.7,-20 v1(19.2,-20) ; U42.4@18.054,-20.354 cw(c18.907,-21.207) 18.907,-20 cw(c18.907,-18.793) U42.4@18.054,-19.646 ; 18.887,-20.005 cw(c18.985,-20.372) v1@19.175,-20.043 ; 18.887,-19.995 ccw(c18.985,-19.628) v1@19.175,-19.957 ; U43.4@23.2,-20 v1(24.7,-20) ; U43.4@23.554,-20.354 cw(c24.407,-21.207) 24.407,-20 cw(c24.407,-18.793) U43.4@23.554,-19.646 ; 24.387,-20.005 cw(c24.485,-20.372) v1@24.675,-20.043 ; 24.387,-19.995 ccw(c24.485,-19.628) v1@24.675,-19.957 ; U45.4@28.7,-20 v1(30.2,-20) ; U45.4@29.054,-20.354 cw(c29.907,-21.207) 29.907,-20 cw(c29.907,-18.793) U45.4@29.054,-19.646 ; 29.887,-20.005 cw(c29.985,-20.372) v1@30.175,-20.043 ; 29.887,-19.995 ccw(c29.985,-19.628) v1@30.175,-19.957 ; U46.4@34.2,-20 v1(35.7,-20) ; U46.4@34.554,-20.354 cw(c35.407,-21.207) 35.407,-20 cw(c35.407,-18.793) U46.4@34.554,-19.646 ; 35.387,-20.005 cw(c35.485,-20.372) v1@35.675,-20.043 ; 35.387,-19.995 ccw(c35.485,-19.628) v1@35.675,-19.957 ; U47.4@39.7,-20 v1(41.2,-20) ; U47.4@40.054,-20.354 cw(c40.907,-21.207) 40.907,-20 cw(c40.907,-18.793) U47.4@40.054,-19.646 ; 40.887,-20.005 cw(c40.985,-20.372) v1@41.175,-20.043 ; 40.887,-19.995 ccw(c40.985,-19.628) v1@41.175,-19.957 ; U48.4@45.2,-20 v1(46.7,-20) ; U48.4@45.554,-20.354 cw(c46.407,-21.207) 46.407,-20 cw(c46.407,-18.793) U48.4@45.554,-19.646 ; 46.387,-20.005 cw(c46.485,-20.372) v1@46.675,-20.043 ; 46.387,-19.995 ccw(c46.485,-19.628) v1@46.675,-19.957
  Bottom Layer w0.5: -2.5,-20.1 v1(-1.3,-20.1) -0.7,-20.1 -0.6,-20 v1(46.7,-20)
NRST: IC2.19 S2.1 | length 78.3
  Top Layer w0.2: S2.1@-16.4,-34.85 v1(-16.4,-32.5) ; -16.4,-33.884 cw(c-17.366,-33.884) -16.683,-34.567 ccw(c-17.366,-33.884) -16.4,-33.884 ; -16.4,-33.884 ccw(c-15.434,-33.884) -16.117,-34.567 cw(c-15.434,-33.884) -16.4,-33.884 ; -16.4,-32.983 cw(c-15.917,-32.983) -16.259,-32.641 ccw(c-15.917,-32.983) -16.4,-32.983 ; -16.4,-32.983 ccw(c-16.883,-32.983) -16.541,-32.641 cw(c-16.883,-32.983) -16.4,-32.983
  Bottom Layer w0.2: IC2.19@-56.923,1.92 ccw(c-56.087,2.091) -56.308,1.267 ; IC2.19@-56.727,1.96 ccw(c-55.733,2.163) -55.996,1.183 ; IC2.19@-56.58,1.99 -30.19,-24.4 -19.5,-24.4 -16.4,-27.5 v1(-16.4,-32.5) ; IC2.19@-56.55,2.137 cw(c-56.753,1.143) -55.773,1.406 ; IC2.19@-56.51,2.333 cw(c-56.681,1.497) -55.857,1.718 ; -55.812,1.222 cw(c-55.044,1.99) -56.13,1.99 ccw(c-55.044,1.99) -55.812,1.222 ; -55.812,1.222 ccw(c-56.58,0.454) -56.58,1.54 cw(c-56.58,0.454) -55.812,1.222 ; -55.47,0.88 cw(c-54.361,1.99) -55.93,1.99 ccw(c-54.361,1.99) -55.47,0.88 ; -55.47,0.88 ccw(c-56.58,-0.229) -56.58,1.34 cw(c-56.58,-0.229) -55.47,0.88 ; -16.4,-32.017 cw(c-16.883,-32.017) -16.541,-32.359 ccw(c-16.883,-32.017) -16.4,-32.017 ; -16.4,-32.017 ccw(c-15.917,-32.017) -16.259,-32.359 cw(c-15.917,-32.017) -16.4,-32.017
OUTPUT1: J11.2 U34.11 U34.12 | length 39.9
  Top Layer w0.5: J11.2@42.155,38.95 ccw(c44.097,39.348) 43.584,37.433 ; J11.2@42.4,39 45.4,36 54.8,36 57.12,33.68 U34.12@57.12,31.55 U34.11@58.39,31.55 ; J11.2@42.45,39.245 cw(c42.052,37.303) 43.967,37.816 ; 43.68,37.72 cw(c44.961,39) 43.15,39 ccw(c44.961,39) 43.68,37.72 ; 43.68,37.72 ccw(c42.4,36.439) 42.4,38.25 cw(c42.4,36.439) 43.68,37.72 ; 44.534,36.866 cw(c46.668,39) 43.65,39 ccw(c46.668,39) 44.534,36.866 ; 44.534,36.866 ccw(c42.4,34.732) 42.4,37.75 cw(c42.4,34.732) 44.534,36.866
OUTPUT2: J11.3 U34.13 U34.14 | length 42.9
  Top Layer w0.5: J11.3@37.055,38.95 ccw(c38.997,39.348) 38.484,37.433 ; J11.3@37.3,39 41,35.3 53.8,35.3 54.58,34.52 U34.14@54.58,31.55 U34.13@55.85,31.55 ; J11.3@37.35,39.245 cw(c36.952,37.303) 38.867,37.816 ; 38.58,37.72 cw(c39.861,39) 38.05,39 ccw(c39.861,39) 38.58,37.72 ; 38.58,37.72 ccw(c37.3,36.439) 37.3,38.25 cw(c37.3,36.439) 38.58,37.72 ; 39.434,36.866 cw(c41.568,39) 38.55,39 ccw(c41.568,39) 39.434,36.866 ; 39.434,36.866 ccw(c37.3,34.732) 37.3,37.75 cw(c37.3,34.732) 39.434,36.866
OUTPUT3: J11.4 U34.15 U34.16 | length 45.1
  Top Layer w0.5: J11.4@31.955,38.95 ccw(c33.897,39.348) 33.384,37.433 ; J11.4@32.2,39 36.6,34.6 51.3,34.6 52.04,33.86 U34.16@52.04,31.55 U34.15@53.31,31.55 ; J11.4@32.25,39.245 cw(c31.852,37.303) 33.767,37.816 ; 33.48,37.72 cw(c34.761,39) 32.95,39 ccw(c34.761,39) 33.48,37.72 ; 33.48,37.72 ccw(c32.2,36.439) 32.2,38.25 cw(c32.2,36.439) 33.48,37.72 ; 34.334,36.866 cw(c36.468,39) 33.45,39 ccw(c36.468,39) 34.334,36.866 ; 34.334,36.866 ccw(c32.2,34.732) 32.2,37.75 cw(c32.2,34.732) 34.334,36.866
OUTPUT4: J11.5 U34.17 U34.18 | length 46.3
  Top Layer w0.5: J11.5@26.855,38.95 ccw(c28.797,39.348) 28.284,37.433 ; J11.5@27.1,39 34.55,31.55 U34.18@49.5,31.55 U34.17@50.77,31.55 ; J11.5@27.15,39.245 cw(c26.752,37.303) 28.667,37.816 ; 28.38,37.72 cw(c29.661,39) 27.85,39 ccw(c29.661,39) 28.38,37.72 ; 28.38,37.72 ccw(c27.1,36.439) 27.1,38.25 cw(c27.1,36.439) 28.38,37.72 ; 29.234,36.866 cw(c31.368,39) 28.35,39 ccw(c31.368,39) 29.234,36.866 ; 29.234,36.866 ccw(c27.1,34.732) 27.1,37.75 cw(c27.1,34.732) 29.234,36.866
OUTPUT5: J11.6 U39.11 U39.12 | length 68.8
  Top Layer w0.5: v1(57.12,19.48) U39.12@57.12,17.45 U39.11@58.39,17.45
  Bottom Layer w0.5: J11.6@21.755,38.95 ccw(c23.697,39.348) 23.184,37.433 ; J11.6@22,39 28.7,32.3 48.97,32.3 57.12,24.15 v1(57.12,19.48) ; J11.6@22.05,39.245 cw(c21.652,37.303) 23.567,37.816 ; 23.28,37.72 cw(c24.561,39) 22.75,39 ccw(c24.561,39) 23.28,37.72 ; 23.28,37.72 ccw(c22,36.439) 22,38.25 cw(c22,36.439) 23.28,37.72 ; 24.134,36.866 cw(c26.268,39) 23.25,39 ccw(c26.268,39) 24.134,36.866 ; 24.134,36.866 ccw(c22,34.732) 22,37.75 cw(c22,34.732) 24.134,36.866
OUTPUT6: J11.7 U39.13 U39.14 | length 72.3
  Top Layer w0.5: v1(54.58,19.48) U39.14@54.58,17.45 U39.13@55.85,17.45
  Bottom Layer w0.5: J11.7@16.655,38.95 ccw(c18.597,39.348) 18.084,37.433 ; J11.7@16.9,39 24.3,31.6 48.68,31.6 54.58,25.7 v1(54.58,19.48) ; J11.7@16.95,39.245 cw(c16.552,37.303) 18.467,37.816 ; 18.18,37.72 cw(c19.461,39) 17.65,39 ccw(c19.461,39) 18.18,37.72 ; 18.18,37.72 ccw(c16.9,36.439) 16.9,38.25 cw(c16.9,36.439) 18.18,37.72 ; 19.034,36.866 cw(c21.168,39) 18.15,39 ccw(c21.168,39) 19.034,36.866 ; 19.034,36.866 ccw(c16.9,34.732) 16.9,37.75 cw(c16.9,34.732) 19.034,36.866
OUTPUT7: J11.8 U39.15 U39.16 | length 75.7
  Top Layer w0.5: v1(52.04,19.46) U39.16@52.04,17.45 U39.15@53.31,17.45
  Bottom Layer w0.5: J11.8@11.555,38.95 ccw(c13.497,39.348) 12.984,37.433 ; J11.8@11.8,39 19.9,30.9 48.39,30.9 52.04,27.25 v1(52.04,19.46) ; J11.8@11.85,39.245 cw(c11.452,37.303) 13.367,37.816 ; 13.08,37.72 cw(c14.361,39) 12.55,39 ccw(c14.361,39) 13.08,37.72 ; 13.08,37.72 ccw(c11.8,36.439) 11.8,38.25 cw(c11.8,36.439) 13.08,37.72 ; 13.934,36.866 cw(c16.068,39) 13.05,39 ccw(c16.068,39) 13.934,36.866 ; 13.934,36.866 ccw(c11.8,34.732) 11.8,37.75 cw(c11.8,34.732) 13.934,36.866
OUTPUT8: J11.9 U39.17 U39.18 | length 79.2
  Top Layer w0.5: v1(49.5,19.5) U39.18@49.5,17.45 U39.17@50.77,17.45
  Bottom Layer w0.5: J11.9@6.455,38.95 ccw(c8.397,39.348) 7.884,37.433 ; J11.9@6.7,39 15.5,30.2 48.1,30.2 49.5,28.8 v1(49.5,19.5) ; J11.9@6.75,39.245 cw(c6.352,37.303) 8.267,37.816 ; 7.98,37.72 cw(c9.261,39) 7.45,39 ccw(c9.261,39) 7.98,37.72 ; 7.98,37.72 ccw(c6.7,36.439) 6.7,38.25 cw(c6.7,36.439) 7.98,37.72 ; 8.834,36.866 cw(c10.968,39) 7.95,39 ccw(c10.968,39) 8.834,36.866 ; 8.834,36.866 ccw(c6.7,34.732) 6.7,37.75 cw(c6.7,34.732) 8.834,36.866
OUTPUT9: J10.1 U44.11 U44.12 | length 79.9
  Top Layer w0.5: v1(50.61,-19.89) U44.11@50.61,-17.55 U44.12@51.88,-17.55
  Bottom Layer w0.5: J10.1@6.257,-38.943 cw(c8.265,-39.412) 7.731,-37.42 ; J10.1@6.4,-39.2 13.2,-32.4 45.9,-32.4 50.61,-27.69 v1(50.61,-19.89) ; J10.1@6.543,-39.246 ccw(c6.215,-37.37) 8.055,-37.863 ; J10.1@6.5,-38.25 ccw(c6.5,-36.198) 7.951,-37.649 cw(c6.5,-36.198) J10.1@6.5,-38.25 ; J10.1@6.5,-37.75 ccw(c6.5,-34.491) 8.805,-36.795 cw(c6.5,-34.491) J10.1@6.5,-37.75 ; J10.1@7.25,-39 cw(c8.819,-39) 7.71,-37.89 ccw(c8.819,-39) J10.1@7.25,-39 ; J10.1@7.75,-39 cw(c10.526,-39) 8.563,-37.037 ccw(c10.526,-39) J10.1@7.75,-39
OUTPUT10: J10.2 U44.13 U44.14 | length 76.5
  Top Layer w0.5: v1(53.15,-19.95) U44.13@53.15,-17.55 U44.14@54.42,-17.55
  Bottom Layer w0.5: J10.2@11.357,-38.943 cw(c13.365,-39.412) 12.831,-37.42 ; J10.2@11.5,-39.2 17.6,-33.1 46.19,-33.1 53.15,-26.14 v1(53.15,-19.95) ; J10.2@11.643,-39.246 ccw(c11.315,-37.37) 13.155,-37.863 ; J10.2@11.6,-38.25 ccw(c11.6,-36.198) 13.051,-37.649 cw(c11.6,-36.198) J10.2@11.6,-38.25 ; J10.2@11.6,-37.75 ccw(c11.6,-34.491) 13.905,-36.795 cw(c11.6,-34.491) J10.2@11.6,-37.75 ; J10.2@12.35,-39 cw(c13.919,-39) 12.81,-37.89 ccw(c13.919,-39) J10.2@12.35,-39 ; J10.2@12.85,-39 cw(c15.626,-39) 13.663,-37.037 ccw(c15.626,-39) J10.2@12.85,-39
OUTPUT11: J10.3 U44.15 U44.16 | length 73
  Top Layer w0.5: v1(55.69,-19.99) U44.15@55.69,-17.55 U44.16@56.96,-17.55
  Bottom Layer w0.5: J10.3@16.457,-38.943 cw(c18.465,-39.412) 17.931,-37.42 ; J10.3@16.6,-39.2 22,-33.8 46.48,-33.8 55.69,-24.59 v1(55.69,-19.99) ; J10.3@16.743,-39.246 ccw(c16.415,-37.37) 18.255,-37.863 ; J10.3@16.7,-38.25 ccw(c16.7,-36.198) 18.151,-37.649 cw(c16.7,-36.198) J10.3@16.7,-38.25 ; J10.3@16.7,-37.75 ccw(c16.7,-34.491) 19.005,-36.795 cw(c16.7,-34.491) J10.3@16.7,-37.75 ; J10.3@17.45,-39 cw(c19.019,-39) 17.91,-37.89 ccw(c19.019,-39) J10.3@17.45,-39 ; J10.3@17.95,-39 cw(c20.726,-39) 18.763,-37.037 ccw(c20.726,-39) J10.3@17.95,-39
OUTPUT12: J10.4 U44.17 U44.18 | length 69.5
  Top Layer w0.5: v1(58.23,-19.97) U44.17@58.23,-17.55 U44.18@59.5,-17.55
  Bottom Layer w0.5: J10.4@21.557,-38.943 cw(c23.565,-39.412) 23.031,-37.42 ; J10.4@21.7,-39.2 26.4,-34.5 46.77,-34.5 58.23,-23.04 v1(58.23,-19.97) ; J10.4@21.843,-39.246 ccw(c21.515,-37.37) 23.355,-37.863 ; J10.4@21.8,-38.25 ccw(c21.8,-36.198) 23.251,-37.649 cw(c21.8,-36.198) J10.4@21.8,-38.25 ; J10.4@21.8,-37.75 ccw(c21.8,-34.491) 24.105,-36.795 cw(c21.8,-34.491) J10.4@21.8,-37.75 ; J10.4@22.55,-39 cw(c24.119,-39) 23.01,-37.89 ccw(c24.119,-39) J10.4@22.55,-39 ; J10.4@23.05,-39 cw(c25.826,-39) 23.863,-37.037 ccw(c25.826,-39) J10.4@23.05,-39
OUTPUT13: J10.5 U49.11 U49.12 | length 48.8
  Top Layer w0.5: J10.5@26.657,-38.943 cw(c28.665,-39.412) 28.131,-37.42 ; J10.5@26.8,-39.2 32,-34 50.2,-34 50.61,-33.59 U49.11@50.61,-31.75 U49.12@51.88,-31.75 ; J10.5@26.943,-39.246 ccw(c26.615,-37.37) 28.455,-37.863 ; J10.5@26.9,-38.25 ccw(c26.9,-36.198) 28.351,-37.649 cw(c26.9,-36.198) J10.5@26.9,-38.25 ; J10.5@26.9,-37.75 ccw(c26.9,-34.491) 29.205,-36.795 cw(c26.9,-34.491) J10.5@26.9,-37.75 ; J10.5@27.65,-39 cw(c29.219,-39) 28.11,-37.89 ccw(c29.219,-39) J10.5@27.65,-39 ; J10.5@28.15,-39 cw(c30.926,-39) 28.963,-37.037 ccw(c30.926,-39) J10.5@28.15,-39
OUTPUT14: J10.6 U49.13 U49.14 | length 46.3
  Top Layer w0.5: J10.6@31.757,-38.943 cw(c33.765,-39.412) 33.231,-37.42 ; J10.6@31.9,-39.2 36.4,-34.7 52.1,-34.7 53.15,-33.65 U49.13@53.15,-31.75 U49.14@54.42,-31.75 ; J10.6@32.043,-39.246 ccw(c31.715,-37.37) 33.555,-37.863 ; J10.6@32,-38.25 ccw(c32,-36.198) 33.451,-37.649 cw(c32,-36.198) J10.6@32,-38.25 ; J10.6@32,-37.75 ccw(c32,-34.491) 34.305,-36.795 cw(c32,-34.491) J10.6@32,-37.75 ; J10.6@32.75,-39 cw(c34.319,-39) 33.21,-37.89 ccw(c34.319,-39) J10.6@32.75,-39 ; J10.6@33.25,-39 cw(c36.026,-39) 34.063,-37.037 ccw(c36.026,-39) J10.6@33.25,-39
OUTPUT15: J10.7 U49.15 U49.16 | length 43.8
  Top Layer w0.5: J10.7@36.857,-38.943 cw(c38.865,-39.412) 38.331,-37.42 ; J10.7@37,-39.2 40.8,-35.4 54.1,-35.4 55.69,-33.81 U49.15@55.69,-31.75 U49.16@56.96,-31.75 ; J10.7@37.143,-39.246 ccw(c36.815,-37.37) 38.655,-37.863 ; J10.7@37.1,-38.25 ccw(c37.1,-36.198) 38.551,-37.649 cw(c37.1,-36.198) J10.7@37.1,-38.25 ; J10.7@37.1,-37.75 ccw(c37.1,-34.491) 39.405,-36.795 cw(c37.1,-34.491) J10.7@37.1,-37.75 ; J10.7@37.85,-39 cw(c39.419,-39) 38.31,-37.89 ccw(c39.419,-39) J10.7@37.85,-39 ; J10.7@38.35,-39 cw(c41.126,-39) 39.163,-37.037 ccw(c41.126,-39) J10.7@38.35,-39
OUTPUT16: J10.8 U49.17 U49.18 | length 41.2
  Top Layer w0.5: J10.8@41.957,-38.943 cw(c43.965,-39.412) 43.431,-37.42 ; J10.8@42.1,-39.2 44.8,-36.5 55.5,-36.5 58.23,-33.77 U49.17@58.23,-31.75 U49.18@59.5,-31.75 ; J10.8@42.243,-39.246 ccw(c41.915,-37.37) 43.755,-37.863 ; J10.8@42.2,-38.25 ccw(c42.2,-36.198) 43.651,-37.649 cw(c42.2,-36.198) J10.8@42.2,-38.25 ; J10.8@42.2,-37.75 ccw(c42.2,-34.491) 44.505,-36.795 cw(c42.2,-34.491) J10.8@42.2,-37.75 ; J10.8@42.95,-39 cw(c44.519,-39) 43.41,-37.89 ccw(c44.519,-39) J10.8@42.95,-39 ; J10.8@43.45,-39 cw(c46.226,-39) 44.263,-37.037 ccw(c46.226,-39) J10.8@43.45,-39
PA0: IC2.25
PA1: IC2.24